# Altium PCB PCB1.PcbDoc
Units mil, origin at the board's own origin, x right, y up, seen from the top; angles counter-clockwise.
Board outline 3670 x 3230 mil, 2 copper layers (Top Layer, Bottom Layer); 72 components, 56 nets, 231 pads, 2 vias.
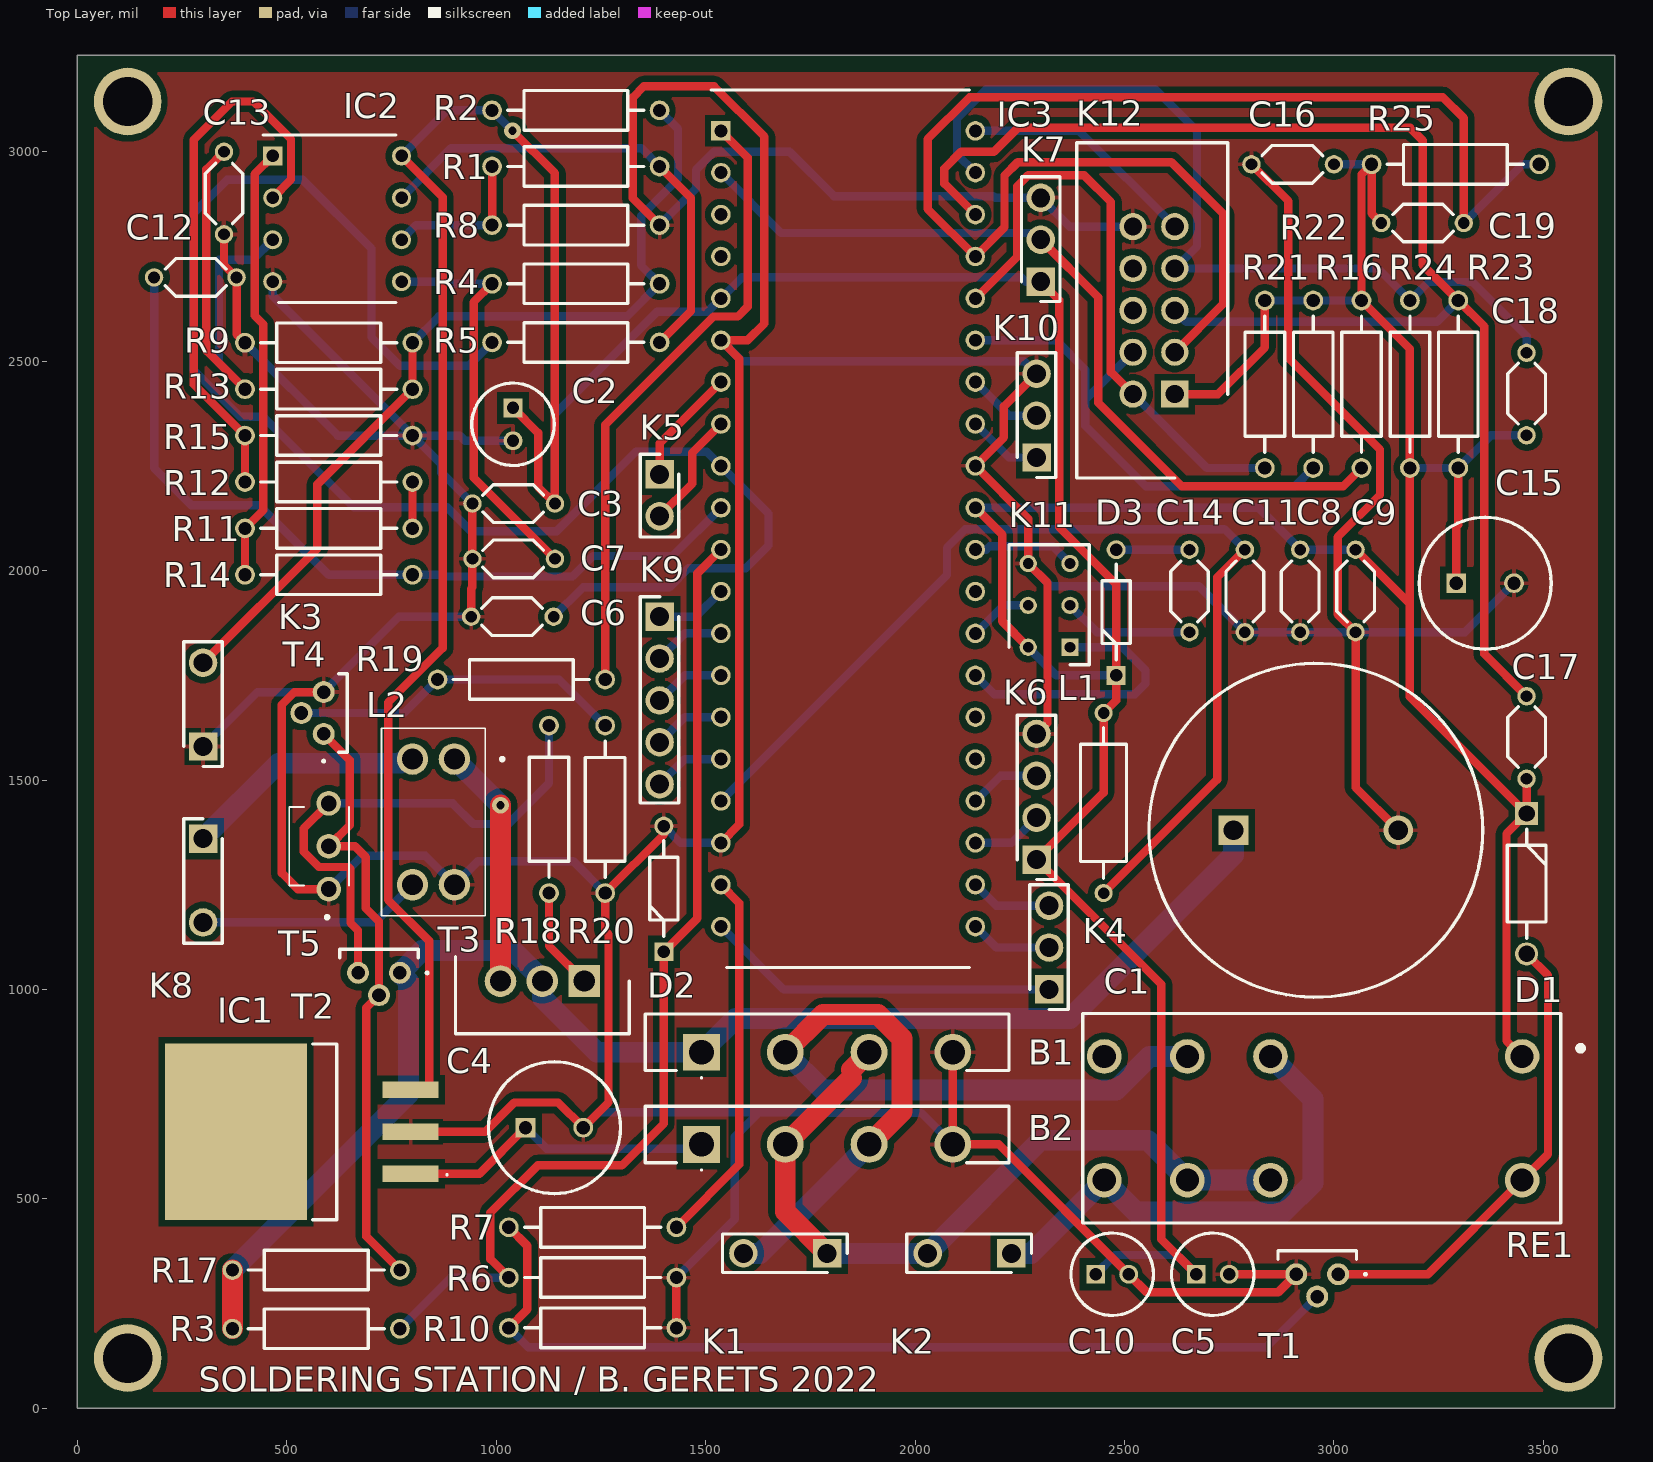
[diagram p0: Top Layer view]
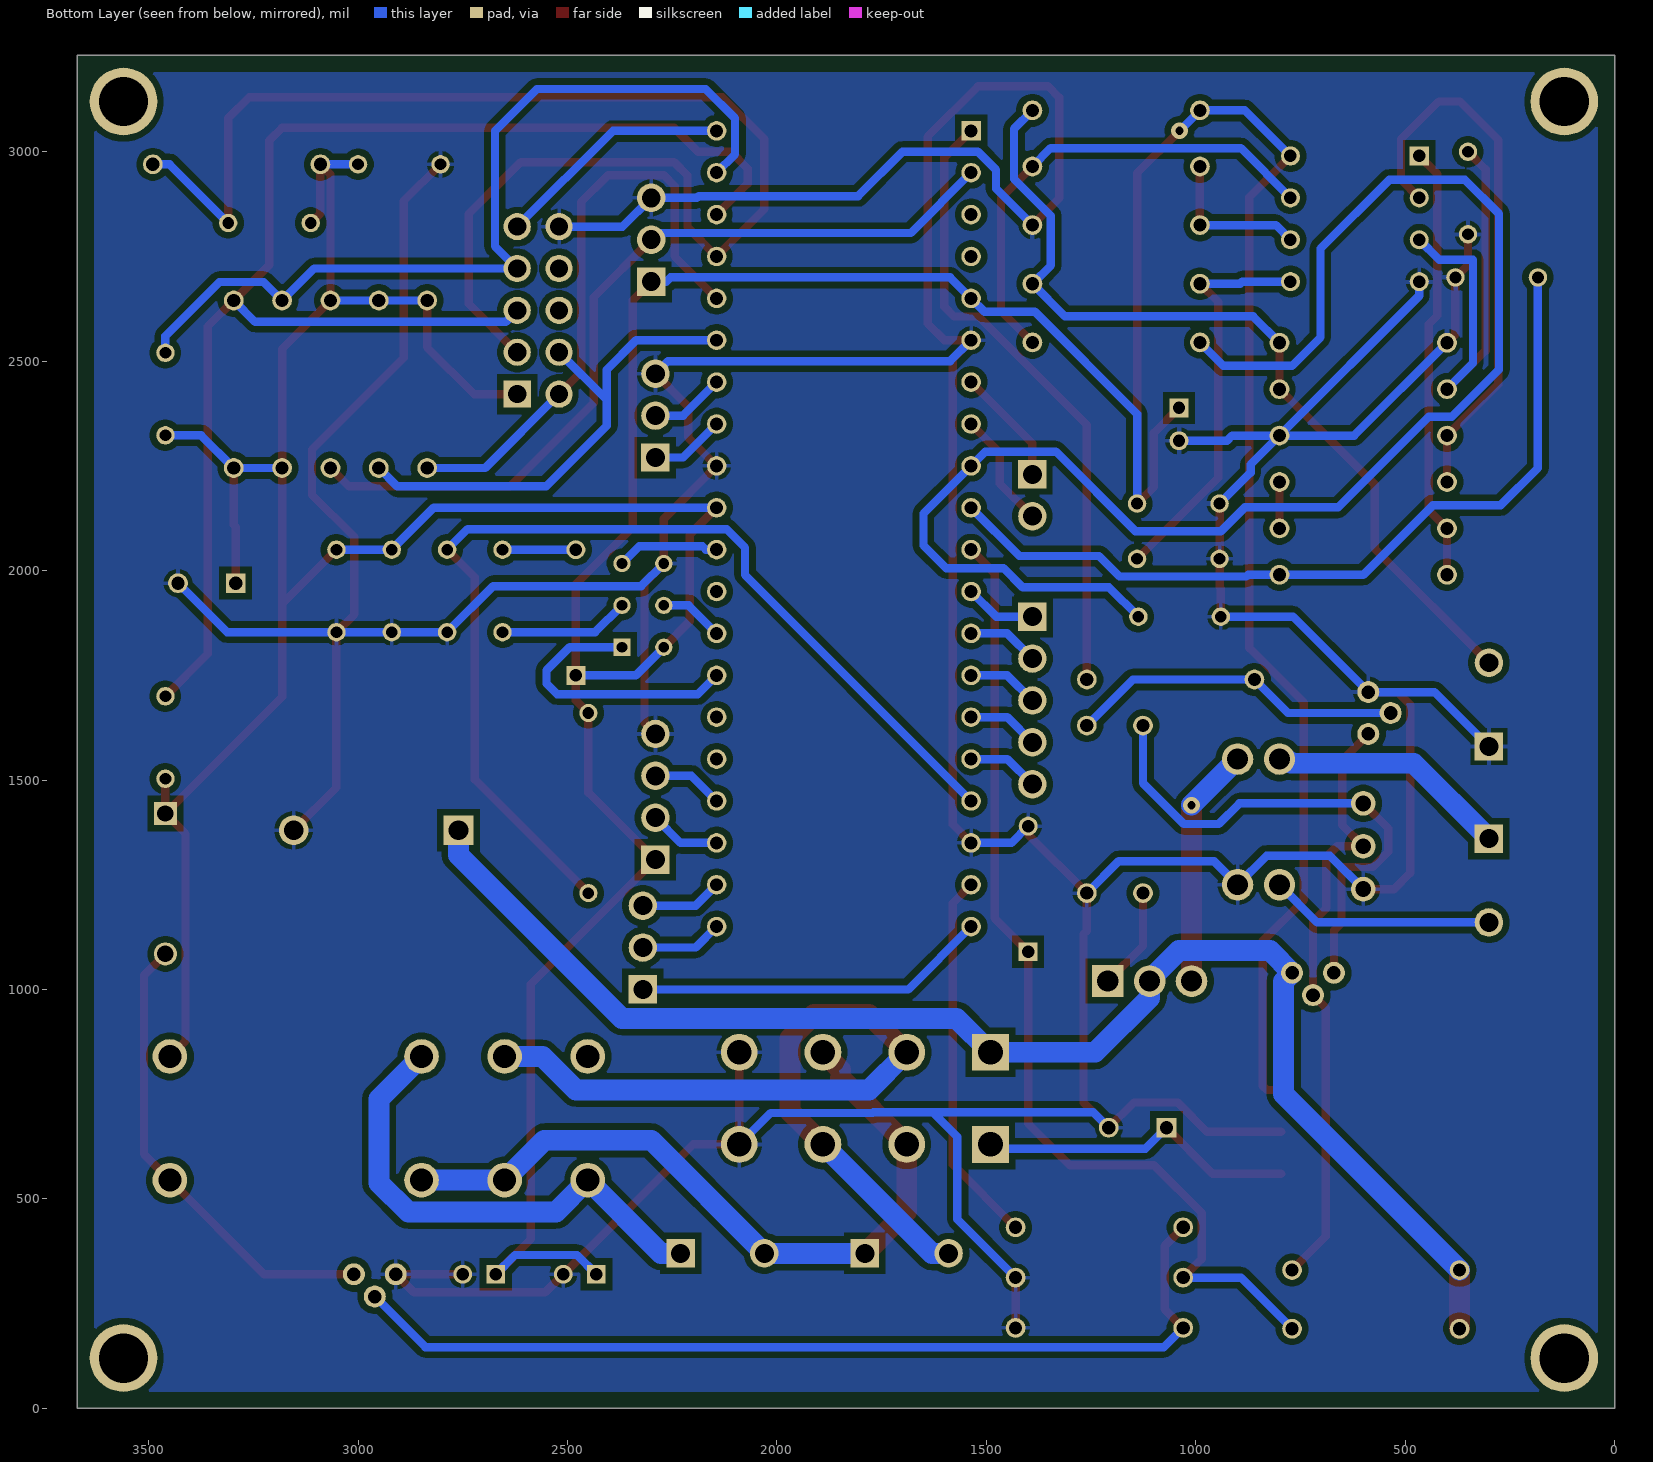
[diagram p1: Bottom Layer view, seen from below]

## Layer stack, top to bottom
Top Solder: solder mask 0.4, Solder Resist, Dk 3.5
Top Layer: signal copper 1.4
Dielectric 1: dielectric 12.6, FR-4, Dk 4.8
Bottom Layer: signal copper 1.4
Bottom Solder: solder mask 0.4, Solder Resist, Dk 3.5

## Board outline
0,0 3670,0 3670,3230 0,3230

## Design rules (kind name [scope] priority, off if disabled: settings)
Clearance Clearance_2 [InNamedPolygon('GND_L02_P000')] p1: gap=15 ignorepadtopadclearanceinfootprint=FALSE
Clearance Clearance_1 [InNamedPolygon('GND_L01_P001')] p2: gap=15 ignorepadtopadclearanceinfootprint=FALSE
Clearance [All] p3: gap=10 ignorepadtopadclearanceinfootprint=FALSE except(0: Arc-Hole Track-Hole SMDPad-Hole THPad-Hole Via-Hole Fill-Hole Poly-Hole Region-Hole Text-Hole)
Height [All] p1 off: minheight=0 maxheight=1000 prefheight=500
HoleSize [All] p1: absolutevalues=TRUE maxlimit=120 minlimit=20 maxpercent=80.000 minpercent=20.000
HoleToHoleClearance [All] p1: gap=19.68 allowstackedmicrovias=TRUE
PolygonConnect [All] p1: connectstyle=Relief reliefconductorwidth=10 reliefentries=4 polygonreliefangle="90 Angle" airgapwidth=10
RoutingVias [All] p1: holewidth=20 width=40 viastyle="Through Hole" minholewidth=20 minwidth=40 maxholewidth=20 maxwidth=40
SilkToSolderMaskClearance [IsPad] p1: minsilkscreentomaskgap=1 clearancetoexposedcopper=TRUE
SolderMaskExpansion [All] p1: expansion=4 istentingtop=FALSE
Width [All] p1: maxlimit=50 minlimit=20 preferedwidth=20 minimp=50.000000 maximp=50.000000 favimp=50.000000
26 further rules are at their usual default settings.

## Classes and differential pairs
component class Processor: C8 C9 C10 C11 C14 D3 IC3 K4 K5 K6 K7 K9 K10 K11 K12 L1 R16 R21 R22
component class Power: B1 B2 C1 C4 C5 D1 D2 IC1 K1 K2 R3 R6 R7 R10 RE1 T1
component class Heating: K8 L2 R17 R18 R19 R20 T2 T3 T4 T5
component class Display: C15 C16 C17 C18 C19 R23 R24 R25
component class Amplification: C2 C3 C6 C7 C12 C13 IC2 K3 R1 R2 R4 R5 R8 R9 R11 R12 R13 R14 R15

## Components (designator, comment, footprint, x,y, rotation, side; value= is the part's Value field where it differs from the comment)
B1 "GBU6J-E3_45" GBU6JE345 1490,850 r180 top
B2 "GBU6J-E3_45" GBU6JE345 1490,630 r180 top
C1 "4700uF" "4700UF CAPACITOR" 2760,1380 r0 top
C2 "10uF" "10UF CAPACITOR" 1040,2388.74 r270 top
C3 "100nF" "5MM LEAD SPACING CAPACITOR" 943,2160 r0 top
C4 "100uF" "100UF CAPACITOR" 1070,670 r0 top
C5 "10uF" "10UF CAPACITOR" 2671.26,320 r0 top
C6 "10nF" "5MM LEAD SPACING CAPACITOR" 940,1890 r0 top
C7 "10nF" "5MM LEAD SPACING CAPACITOR" 943,2028.02 r0 top
C8 "100nF" "5MM LEAD SPACING CAPACITOR" 2919.47,1853 r90 top
C9 "100nF" "5MM LEAD SPACING CAPACITOR" 3051.67,1853 r90 top
C10 "10uF" "10UF CAPACITOR" 2431.26,320 r0 top
C11 "100nF" "5MM LEAD SPACING CAPACITOR" 2787.26,1853 r90 top
C12 "10nF" "5MM LEAD SPACING CAPACITOR" 380,2700 r180 top
C13 "10nF" "5MM LEAD SPACING CAPACITOR" 350,2803 r90 top
C14 "100nF" "5MM LEAD SPACING CAPACITOR" 2655.06,1853 r90 top
C15 "100uF" "100UF CAPACITOR" 3292.2,1970 r0 top
C16 "100nF" "5MM LEAD SPACING CAPACITOR" 2803,2970 r0 top
C17 "10nF" "5MM LEAD SPACING CAPACITOR" 3460,1700 r270 top
C18 "10nF" "5MM LEAD SPACING CAPACITOR" 3460,2520 r270 top
C19 "10nF" "5MM LEAD SPACING CAPACITOR" 3310,2830 r180 top
D1 "1N4007" "0.77MM LEAD DIODE" 3460,1420 r270 top
D2 "1N5231B" "0.5MM LEAD DIODE" 1400,1090 r90 top
D3 "1N4148" "0.5MM LEAD DIODE" 2480,1750 r90 top
IC1 "TL780-05CKTTR" TL78005CKTTR 530,660 r90 top
IC2 "MCP6002-E/P" DIP8E 620,2840 r0 top
IC3 "ATMEGA4809-PF" DIP40E 1840,2100 r0 top
K1 "1729128" "2-PIN TERMINAL BLOCK" 1790,370 r180 top
K2 "1729128" "2-PIN TERMINAL BLOCK" 2230,370 r180 top
K3 "1729128" "2-PIN TERMINAL BLOCK" 300,1580 r90 top
K4 "61300311121" "3-PIN HEADER" 2320,1000 r90 top
K5 "61300311121" "2-PIN HEADER" 1390,2230 r270 top
K6 "61300411121" "4-PIN HEADER" 2290,1310 r90 top
K7 "61300311121" "3-PIN HEADER" 2300,2690 r90 top
K8 "1729128" "2-PIN TERMINAL BLOCK" 300,1360 r270 top
K9 "61300411121" "5-PIN HEADER" 1390,1890 r270 top
K10 "61300311121" "3-PIN HEADER" 2290,2270 r90 top
K11 "61301621121" "2-ROW 6-PIN HEADER" 2370,1817.06 r90 top
K12 "61301621121" "10-WAY BOXHEADER" 2620,2421.32 r90 top
L1 "10uH" "10UH CHOKE COIL" 2450,1230 r90 top
L2 "common mode choke" "common mode choke" 900,1550 r180 top
R1 "18kOhm" RESISTOR 1390,2964.86 r180 top
R2 "1MOhm" RESISTOR 1390,3098.89 r180 top
R3 "68kOhm" RESISTOR 770,190 r180 top
R4 "5.6kOhm" RESISTOR 1390,2684.86 r180 top
R5 "5.6kOhm" RESISTOR 990,2544.86 r0 top
R6 "10kOhm" RESISTOR 1430,312.01 r180 top
R7 "10kOhm" RESISTOR 1430,432.01 r180 top
R8 "100Ohm" RESISTOR 1390,2824.86 r180 top
R9 "10MOhm" RESISTOR 400,2544.03 r0 top
R10 "4.7kOhm" RESISTOR 1430,192.01 r180 top
R11 "18kOhm" RESISTOR 400,2100.81 r0 top
R12 "18kOhm" RESISTOR 800,2211.61 r180 top
R13 "5.6kOhm" RESISTOR 400,2433.22 r0 top
R14 "5.6kOhm" RESISTOR 800,1990 r180 top
R15 "100Ohm" RESISTOR 800,2322.42 r180 top
R16 "4.7kOhm" RESISTOR 3065.9,2245 r90 top
R17 "4.7kOhm" RESISTOR 770,330 r180 top
R18 "100Ohm" RESISTOR 1125.97,1630 r270 top
R19 "10kOhm" RESISTOR 860,1740 r0 top
R20 "4.7kOhm" RESISTOR 1260,1230 r90 top
R21 "4.7kOhm" RESISTOR 2835,2245 r90 top
R22 "4.7kOhm" RESISTOR 2950.45,2245 r90 top
R23 "10kOhm" RESISTOR 3296.8,2645 r270 top
R24 "10kOhm" RESISTOR 3181.35,2645 r270 top
R25 "10kOhm" RESISTOR 3490,2970 r180 top
RE1 "RT424005" RT42 3449.21,692.36 r180 top
T1 "BC547" BC547CBU 3010,320 r180 top
T2 "BC547" BC547CBU 770,1039.63 r180 top
T3 "IRF9Z34NPBF" TO254P469X1042X1967-3P 1210,1020 r180 top
T4 "BC547" BC547CBU 587.9,1610 r90 top
T5 "BC557" BC33740TA 576.97,1306.41 r90 top

## Footprints (in the part's own frame and the unit in brackets; to place one, negate y for a bottom-side part, rotate by r counter-clockwise, add the part's x,y. Pads: shape width x height; smd on the part's side, far side on the other; paste and mask are expansions set on the pad)
"0.5MM LEAD DIODE" [mm]
  rect 1.15x1.15 hole 0.75: 1(0,0)
  round 1.15 hole 0.75: 2(7.62,0)
  silkscreen extent 0.93,-0.86 6.73,0.86, body extent -0.26,-0.95 7.87,0.95
"0.77MM LEAD DIODE" [mil]
  rect 55x55 hole 39: 1(0,0)
  round 55 hole 39: 2(335.12,0)
  silkscreen extent 37,-46 298,46, body extent -11,-53 345,53
"2-PIN HEADER" [mm]
  rect 1.725x1.725 hole 1.15: 1(0,0)
  round 1.725 hole 1.15: 2(2.54,0)
  silkscreen extent -1.21,-1.17 3.81,1.17, body extent -1.07,-1.17 3.81,1.17
"2-PIN TERMINAL BLOCK" [mm]
  rect 1.725x1.725 hole 1.15: 1(0,0)
  round 1.725 hole 1.15: 2(5.08,0)
  silkscreen extent -1.21,-1.17 6.35,1.17, body extent -2.54,-4.06 7.75,4.06
"2-ROW 6-PIN HEADER" [mm]
  rect 1.05x1.05 hole 0.65: 1(0,0)
  round 1.05 hole 0.65: 2(0,2.54) 3(2.54,0) 4(2.54,2.54) 5(5.08,0) 6(5.08,2.54)
  silkscreen extent -1.07,-1.17 6.22,3.71, body extent -1.07,-1.17 6.22,3.71
"3-PIN HEADER" [mm]
  rect 1.725x1.725 hole 1.15: 1(0,0)
  round 1.725 hole 1.15: 2(2.54,0) 3(5.08,0)
  silkscreen extent -1.21,-1.17 6.35,1.17, body extent -1.07,-1.17 6.35,1.17
"4-PIN HEADER" [mm]
  rect 1.725x1.725 hole 1.15: 1(0,0)
  round 1.725 hole 1.15: 2(2.54,0) 3(5.08,0) 4(7.62,0)
  silkscreen extent -1.21,-1.17 8.76,1.17, body extent -1.07,-1.17 8.64,1.17
"5-PIN HEADER" [mm]
  rect 1.725x1.725 hole 1.15: 1(0,0)
  round 1.725 hole 1.15: 2(2.54,0) 3(5.08,0) 4(7.62,0) 5(10.16,0)
  silkscreen extent -1.21,-1.17 11.3,1.17, body extent -1.07,-1.17 11.18,1.17
"5MM LEAD SPACING CAPACITOR" [mil]
  round 44 hole 28: 1(0,0) 2(197,0)
  silkscreen extent 25,-45 170,45
"10-WAY BOXHEADER" [mm]
  rect 1.65x1.65 hole 1.1: 1(0,0)
  round 1.65 hole 1.1: 2(0,2.54) 3(2.54,0) 4(2.54,2.54) 5(5.08,0) 6(5.08,2.54) 7(7.62,0) 8(7.62,2.54) 9(10.16,0) 10(10.16,2.54)
  silkscreen extent -5.08,-3.21 15.24,5.95, body extent -5.08,-3.2 14.99,5.74
"10UF CAPACITOR" [mm]
  rect 1.15x1.15 hole 0.75: 1(0,0)
  round 1.15 hole 0.75: 2(2,0)
  silkscreen extent -1.5,-2.5 3.5,2.5, body extent -1.75,-2.75 3.75,2.75, height 12
"10UH CHOKE COIL" [mm]
  round 1.1 hole 0.7: 1(0,0) 2(10.922,0)
  silkscreen extent 0.9,-1.4 10.02,1.4, body extent -0.25,-1.39 11.18,1.39
"100UF CAPACITOR" [mm]
  rect 1.2x1.2 hole 0.8: 1(0,0)
  round 1.2 hole 0.8: 2(3.5,0)
  silkscreen extent -2.25,-4 5.75,4, body extent -2.5,-4.25 6,4.25, height 12.5
"4700UF CAPACITOR" [mm]
  rect 1.8x1.8 hole 1.2: 1(0,0)
  round 1.8 hole 1.2: 2(10,0)
  silkscreen extent -5.12,-10.12 15.12,10.12, body extent -5.25,-10.24 15.25,10.24, height 42
BC547CBU [mm]
  round 1.333 hole 0.82: 1(0,0) 2(1.27,1.35) 3(2.54,0)
  silkscreen extent -1.7,-1.43 3.65,0.05, body extent -1.11,-1.43 3.65,2.19, height 5.43
BC33740TA [mm]
  round 1.493 hole 0.96: 1(-1.7,-0.585) 2(0.9,-0.585) 3(3.5,-0.585)
  silkscreen extent -3.5,-1.81 3.28,1.81, body extent -2.2,-2.42 3.96,1.71, height 8.67
"common mode choke" [mil]
  round 75 hole 50: 1(0,0) 2(100,0) 3(100,300) 4(0,300)
  silkscreen extent -118,-74 174,374, body extent -74,-74 174,374, height 378
DIP8E [mm]
  rect 1.158x1.158 hole 0.758: 1(-3.905,3.81)
  round 1.158 hole 0.758: 2(-3.905,1.27) 3(-3.905,-1.27) 4(-3.905,-3.81) 5(3.905,-3.81) 6(3.905,-1.27) 7(3.905,1.27) 8(3.905,3.81)
  silkscreen extent -4.48,-5.08 3.56,5.08, body extent -4.04,-4.75 4.04,4.75, height 5.33
DIP40E [mm]
  rect 1.184x1.184 hole 0.784: 1(-7.715,24.13)
  round 1.184 hole 0.784: 2(-7.715,21.59) 3(-7.715,19.05) 4(-7.715,16.51) 5(-7.715,13.97) 6(-7.715,11.43) 7(-7.715,8.89) 8(-7.715,6.35) 9(-7.715,3.81) 10(-7.715,1.27) 11(-7.715,-1.27) 12(-7.715,-3.81) 13(-7.715,-6.35) 14(-7.715,-8.89) 15(-7.715,-11.43) 16(-7.715,-13.97) 17(-7.715,-16.51) 18(-7.715,-19.05) 19(-7.715,-21.59) 20(-7.715,-24.13) 21(7.715,-24.13) 22(7.715,-21.59) 23(7.715,-19.05) 24(7.715,-16.51) 25(7.715,-13.97) 26(7.715,-11.43) 27(7.715,-8.89) 28(7.715,-6.35) 29(7.715,-3.81) 30(7.715,-1.27) 31(7.715,1.27) 32(7.715,3.81) 33(7.715,6.35) 34(7.715,8.89) 35(7.715,11.43) 36(7.715,13.97) 37(7.715,16.51) 38(7.715,19.05) 39(7.715,21.59) 40(7.715,24.13)
  silkscreen extent -8.31,-26.61 7.37,26.61, body extent -7.86,-25.88 7.86,25.88, height 6.35
GBU6JE345 [mm]
  rect 2.235x2.235 hole 1.49: 1(0,0)
  round 2.235 hole 1.49: 2(-5.08,0) 3(-10.16,0) 4(-15.24,0)
  silkscreen extent -18.65,-2.32 3.41,1.6, body extent -18.65,-2.32 3.4,1.11, height 18.9
RESISTOR [mm]
  round 1.2 hole 0.8: 1(0,0) 2(10.16,0)
  silkscreen extent 0.95,-1.2 9.21,1.2, body extent -0.25,-1.3 10.41,1.3
RT42 [mm]
  round 2.1 hole 1.4: 1(0,-3.75) 2(15.26,-3.75) 3(20.3,-3.75) 4(25.34,-3.75) 5(25.34,3.75) 6(20.3,3.75) 7(15.26,3.75) 8(0,3.75)
  silkscreen extent -3.67,-6.35 26.65,6.35, body extent -2.21,-6.35 26.79,6.35, height 15.86
TL78005CKTTR [mm]
  rect 1x3.4 smd: 1(-2.54,-6.745) 2(0,-6.745) 3(2.54,-6.745)
  rect 10.7x8.6 smd: 4(0,3.855)
  silkscreen extent -5.33,-9 5.33,-0.8
TO254P469X1042X1967-3P [mm]
  rect 1.92x1.92 hole 1.28: 1(0,0)
  round 1.92 hole 1.28: 2(2.54,0) 3(5.08,0)
  silkscreen extent -2.73,-1.49 7.81,3.2, body extent -2.67,-1.5 7.75,3.19, height 18.84

## Part data
B1 B2: "Bridge Rectifier", Manufacturer_Name=Vishay, Manufacturer_Part_Number=GBU6J-E3/45, Datasheet Link=http://www.vishay.com/docs/88615/gbu6a.pdf, Height=18.8mm
C1: library part "4700uF capacitor", "Capacitor Polarised", Manufacturer_Name=Nichicon, Manufacturer_Part_Number=UVR1H472MRD, Datasheet Link=https://www.mouser.co.uk/datasheet/2/293/e-vr-6088.pdf, Height=42mm
C2 C5 C10: library part "10uF capacitor", "Capacitor Polarised", Manufacturer_Name=Panasonic, Manufacturer_Part_Number=ECA-1HM100B, Mouser2 Part Number=667-ECA-1HM100B, Datasheet Link=https://componentsearchengine.com//ECA-1HM100B.pdf, Height=12mm, Mouser2 Price/Stock=https://www.mouser.com/Search/Refine.aspx?Keyword=667-ECA-1HM100B
C3 C9 C11: library part "100nF capacitor", "Capacitor", Manufacturer_Name=Nichicon, Manufacturer_Part_Number=UVR1H472MRD, Datasheet Link=https://www.mouser.co.uk/datasheet/2/293/e-vr-6088.pdf, Height=42mm
C4: library part "100uF capacitor", "Capacitor Polarised", Manufacturer_Name=Kemet, Manufacturer_Part_Number=ESK107M050AG3EA, Height=12.5mm
C6 C7 C12 C13: library part "10nF capacitor", "Capacitor", Manufacturer_Name=Nichicon, Manufacturer_Part_Number=UVR1H472MRD, Datasheet Link=https://www.mouser.co.uk/datasheet/2/293/e-vr-6088.pdf, Height=42mm
C8 C14 C16 C17 C18 C19: "Capacitor", Manufacturer_Name=Nichicon, Manufacturer_Part_Number=UVR1H472MRD, Datasheet Link=https://www.mouser.co.uk/datasheet/2/293/e-vr-6088.pdf, Height=42mm
C15: "Capacitor Polarised", Manufacturer_Name=Kemet, Manufacturer_Part_Number=ESK107M050AG3EA, Height=12.5mm
D1: "Diode", Manufacturer_Name=Diotec, Mouser Part Number=637-1N4007, Arrow Part Number=1N4007, Arrow Price/Stock=https://www.arrow.com/en/products/1n4007/diotec-semiconductor-ag?region=europe, Datasheet Link=https://diotec.com/tl_files/diotec/files/pdf/datasheets/1n4001.pdf, Manufacturer_Part_Number=1N4007, Mouser Price/Stock=https://www.mouser.co.uk/ProductDetail/Diotec-Semiconductor/1N4007?qs=OlC7AqGiEDmK9mU1uTiCkg%3D%3D
D2: "Zener Diode", Manufacturer_Name="ON Semiconductor", Manufacturer_Part_Number=1N5231B
D3: "Diode", Manufacturer_Name=Nexperia, Datasheet Link=https://datasheet.datasheetarchive.com/originals/distributors/Datasheets-112/DSAP0040891.pdf, Manufacturer_Part_Number=1N4148
IC1: "DC Converter", Manufacturer_Name="Texas Instruments", Datasheet Link=http://www.ti.com/general/docs/suppproductinfo.tsp?distId=26&gotoUrl=http%3A%2F%2Fwww.ti.com%2Flit%2Fgpn%2Ftl780, Height=5.08mm, Manufacturer_Part_Number=TL780-05CKTTR
IC2: "Dual Opamp", Case/Package=PDIP, Input Bias Current=1pA, Input Offset Voltage (Vos)=4.5mV, Max Operating Temperature=125°C, Max Supply Voltage=6V, Min Operating Temperature=-40°C, Min Supply Voltage=1.8V, Nominal Supply Current=100uA, Operating Supply Voltage=5.5V, Output Current=23mA, Package Quantity=60, Power Supply Rejection Ratio (PSRR)=86dB, Voltage Gain=112dB, Amplifier Type="GENERAL PURPOSE", Bandwidth=1MHz, Common Mode Rejection Ratio=60dB, Gain Bandwidth Product=1MHz, Height=3.3mm, Input Offset Voltage-Max=4.5mV, Lead Free="Lead Free", Length=9.27mm, Mount="Through Hole", Number of Amplifiers=2, Number of Channels=2, Number of Circuits=2, Number of Elements=2, Number of Pins=8, Operating Supply Current=100uA, Output Current per Channel=23mA, Packaging=Rail/Tube, Radiation Hardening=No, REACH SVHC="No SVHC", RoHS Compliant=Yes, Slew Rate=0.6V/µs, Slew Rate-Nom=0.6V/µs, Supply Current=100uA, Technology=CMOS, Unity Gain Bandwidth Product=1MHz, Width=6.35mm
IC3: "Integrated Circuit", Manufacturer_Name=Microchip, Mouser2 Part Number=556-ATMEGA4809-PF, Datasheet Link=https://componentsearchengine.com//ATMEGA4809-PF.pdf, Height=6.35mm, Manufacturer_Part_Number=ATMEGA4809-PF, Mouser2 Price/Stock=https://www.mouser.com/Search/Refine.aspx?Keyword=556-ATMEGA4809-PF
K1 K2 K3 K8: library part "MKDSN 1,5/ 2-5,08", "PCB Terminal Block, 13.5 A, 400 V, 2-Pin THD, RoHS, Bulk", Current Rating=13500mA, Manufacturer="Phoenix Contact", Package Description="2-Pin Through Hole Device, Body 8.1 x 10.16 mm, Pitch 5.08 mm", Package Reference=1729128-2, Package Version=03/2015, Voltage Rating=400V, Datasheet URL=https://datasheet.ciiva.com/16046/1729128-16046181.pdf, Datasheet Version=12/2013, Manufacturer URL=http://www.phoenixcontact.com/, Mounting Technology=ThroughHole, No. of Positions=2, No. of Rows=1, Orientation=Horizontal, Package URL=https://www.phoenixcontact.com/online/portal/pi/pxc/product_detail_page/!ut/p/b1/3VdJjqNKFDxLH8AFycySyWY2ozFsEPOMMQaDOX1XedGL_1Vdm5YXJleknhSKeBkvI6EA8ncAo3AYoDhBQGco6KN7VURTdemj9us_IEKEZo_YHiPAEWEFmDGOHMORkqKYCORBZxgL7ZoaZYcbFFUZ3fqxSY6GOuxydWUuHqz1ynmMFygu583Bob0Ewr6Sd_l-5m-kAueHiB0jpRwZwe58wwtkpxtMYd_LmGcDRU02dRNEyWt6Y2ti5pSyJ_reIkzIulrqApdnbT11V5jnCKbYNCvhEM1MCpPByat_X379-iThf08CI5GfOPqfBeS3BRoBOdD55AKVv0iLwCMq-2BrzXWSGRH7pUGD9uwXQjiph3xL0DKQwdGa0JImiIOmBNOestqgwTHSSs2oOep-78apyXQBvNi8ZLaFjvjWvcaUEBu0MC6Wbe-d6mB0FAebo2lUWinqYaZs5DAYzV0RP9yitUjnGJ0iI9xhZkT42OCQNUJJhkgWINNQLP2JFP6OpMg3JCVg70jqHT0lvKOnhHf0lPuOnnLf0VPuWx6_dxwUIvwk5WMkT0kLL1mh61l2yZVSzG3pYV_bqo-mj6uMKwKwdnnW8Jh5RTOJzMOA5c-eJDaZQw4mTMPH02PvS_ZAqNVjVTo2WyYLkwH_KU1mmmG5kjRhDqPXLwwVHvVOjCM60-fpXvTDfMGW1PVFVS1r4e4yVDk4ZdNbkUHvqPqQSeian4UD39fNKmachqdJ1NJbyk8rXT9mXTvPk3oE5meulKGgiruPJek-4I9hTT6G8ZLOyRSm2RRVbThERQad5OS28hdt4YW4vG0stgYYzsWsK4_7y6DZMjJSCqri1kyiZR5vD7pwIrNR7QwPHTcLTI5qT7eRlpHrdGiupYlqQDJ7zy_CND8fWWBoLRXxk1RVcXiBQwbTD4Xi7KL-FuO94t9xaqweXzH, Packing=Bulk, PartNumber=1729128, Pitch=5.08mm, RoHS=TRUE
K4 K7 K10: library part "3-pin header", "THT Vertical Pin Header WR-PHD, Pitch 2.54 mm, Single Row, 3 pins", Contact Resistance=20mOhm, Manufacturer="Wurth Elektronik", Operating Temperature=-40to105degC, Rated Current=3A, Withstanding Voltage=500VAC, Working Voltage=250VAC, Datasheet URL=https://katalog.we-online.de/em/datasheet/6130xx11121.pdf, Gender=Male, Manufacturer URL=http://www.we-online.de, Mounting Technology=THT, Orientation=Vertical, Package Reference=61300311121, Packaging=Bag, Part Number=61300311121, Pin Number=3, Pitch=2.54mm, Publisher=WurthElektronik, Row Number=Single
K5: library part "2-pin header", "THT Vertical Pin Header WR-PHD, Pitch 2.54 mm, Single Row, 3 pins", Contact Resistance=20mOhm, Manufacturer="Wurth Elektronik", Operating Temperature=-40to105degC, Rated Current=3A, Withstanding Voltage=500VAC, Working Voltage=250VAC, Datasheet URL=https://katalog.we-online.de/em/datasheet/6130xx11121.pdf, Gender=Male, Manufacturer URL=http://www.we-online.de, Mounting Technology=THT, Orientation=Vertical, Package Reference=61300311121, Packaging=Bag, Part Number=61300311121, Pin Number=3, Pitch=2.54mm, Publisher=WurthElektronik, Row Number=Single
K6: library part "4-pin header", "THT Vertical Pin Header WR-PHD, Pitch 2.54 mm, Single Row, 4 pins", Contact Resistance=20mOhm, Manufacturer="Wurth Elektronik", Operating Temperature=-40to105degC, Rated Current=3A, Withstanding Voltage=500VAC, Working Voltage=250VAC, Datasheet URL=https://katalog.we-online.de/em/datasheet/6130xx11121.pdf, Gender=Male, Manufacturer URL=http://www.we-online.de, Mounting Technology=THT, Orientation=Vertical, Package Reference=61300411121, Packaging=Bag, Part Number=61300411121, Pin Number=4, Pitch=2.54mm, Publisher=WurthElektronik, Row Number=Single
K9: library part "5-pin header", "THT Vertical Pin Header WR-PHD, Pitch 2.54 mm, Single Row, 4 pins", Contact Resistance=20mOhm, Manufacturer="Wurth Elektronik", Operating Temperature=-40to105degC, Rated Current=3A, Withstanding Voltage=500VAC, Working Voltage=250VAC, Datasheet URL=https://katalog.we-online.de/em/datasheet/6130xx11121.pdf, Gender=Male, Manufacturer URL=http://www.we-online.de, Mounting Technology=THT, Orientation=Vertical, Package Reference=61300411121, Packaging=Bag, Part Number=61300411121, Pin Number=4, Pitch=2.54mm, Publisher=WurthElektronik, Row Number=Single
K11: library part "6-pin header", "THT Vertical Pin Header WR-PHD, Pitch 2.54 mm, Dual Row, 16 pins", Contact Resistance=20mOhm, Manufacturer="Wurth Elektronik", Operating Temperature=-40to105degC, Rated Current=3A, Withstanding Voltage=500VAC, Working Voltage=250VAC, Datasheet URL=https://katalog.we-online.de/em/datasheet/6130xx21121.pdf, Gender=Male, Manufacturer URL=http://www.we-online.de, Mounting Technology=THT, Orientation=Vertical, Package Reference=61301621121, Packaging=Bag, Part Number=61301621121, Pin Number=16, Pitch=2.54mm, Publisher=WurthElektronik, Row Number=Dual
K12: library part "10-pole box header", "THT Vertical Pin Header WR-PHD, Pitch 2.54 mm, Dual Row, 16 pins", Contact Resistance=20mOhm, Manufacturer="Wurth Elektronik", Operating Temperature=-40to105degC, Rated Current=3A, Withstanding Voltage=500VAC, Working Voltage=250VAC, Datasheet URL=https://katalog.we-online.de/em/datasheet/6130xx21121.pdf, Gender=Male, Manufacturer URL=http://www.we-online.de, Mounting Technology=THT, Orientation=Vertical, Package Reference=61301621121, Packaging=Bag, Part Number=61301621121, Pin Number=16, Pitch=2.54mm, Publisher=WurthElektronik, Row Number=Dual
L1: library part "10uH choke coil", "Inductor", Manufacturer_Name=Bourns, Manufacturer_Part_Number=78F100J-RC, Mouser2 Part Number=542-78F100-RC, Datasheet Link=https://componentsearchengine.com//78F100J-RC.pdf, Mouser2 Price/Stock=https://www.mouser.com/Search/Refine.aspx?Keyword=542-78F100-RC
L2: "Inductor", Manufacturer_Name="Laird Technologies", Manufacturer_Part_Number=CM2545X171B-10, Datasheet Link=https://datasheet.datasheetarchive.com/originals/dk/DKDS-7/122753.pdf, Height=9.5mm
R1 R11 R12: library part "18kOhm resistor", "Resistor", Manufacturer_Name="YAGEO (PHYCOMP)", Manufacturer_Part_Number=CFR-25JT-52-10K
R2: library part "1MOhm resistor", "Resistor", Manufacturer_Name=Ohmite, Manufacturer_Part_Number=OK1055E-R52
R3: library part "68kOhm resistor", "Resistor", Manufacturer_Name="YAGEO (PHYCOMP)", Manufacturer_Part_Number=CFR-25JR-52-68K, Datasheet Link=https://componentsearchengine.com/Datasheets/1/CFR-25JR-52-68K.pdf
R4 R5 R13 R14: library part "5.6kOhm resistor", "Resistor", Manufacturer_Name="YAGEO (PHYCOMP)", Manufacturer_Part_Number=CFR-25JB-52-5K6, Mouser2 Part Number=603-CFR-25JB-52-5K6, Datasheet Link=https://componentsearchengine.com//CFR-25JB-52-5K6.pdf, Mouser2 Price/Stock=https://www.mouser.com/Search/Refine.aspx?Keyword=603-CFR-25JB-52-5K6
R6 R19: library part "10kOhm resistor", "Resistor", Manufacturer_Name="YAGEO (PHYCOMP)", Manufacturer_Part_Number=CFR-25JT-52-10K
R7 R23 R24 R25: "Resistor", Manufacturer_Name="YAGEO (PHYCOMP)", Manufacturer_Part_Number=CFR-25JT-52-10K
R8 R15 R18: library part "100Ohm resistor", "Resistor", Manufacturer_Name="YAGEO (PHYCOMP)", Manufacturer_Part_Number=CFR-25JR-52-100R, Mouser2 Part Number=603-CFR-25JR-52100R, Datasheet Link=https://componentsearchengine.com//CFR-25JR-52-100R.pdf, Mouser2 Price/Stock=https://www.mouser.com/Search/Refine.aspx?Keyword=603-CFR-25JR-52100R
R9: library part "10MOhm resistor", "Resistor", Manufacturer_Name="YAGEO (PHYCOMP)", Manufacturer_Part_Number=CFR-25JT-52-10M, Datasheet Link=https://datasheet.datasheetarchive.com/originals/distributors/Datasheets_SAMA/cf5c7c7b14e59499e9125003e6ee5ce2.pdf
R10 R16 R21 R22: "Resistor", Manufacturer_Name="YAGEO (PHYCOMP)", Manufacturer_Part_Number=CFR-25JT-52-4K7, Mouser2 Part Number=603-CFR-25JT-52-4K7, Datasheet Link=https://componentsearchengine.com//CFR-25JT-52-4K7.pdf, Mouser2 Price/Stock=https://www.mouser.com/Search/Refine.aspx?Keyword=603-CFR-25JT-52-4K7
R17 R20: library part "4.7kOhm resistor", "Resistor", Manufacturer_Name="YAGEO (PHYCOMP)", Manufacturer_Part_Number=CFR-25JT-52-4K7, Mouser2 Part Number=603-CFR-25JT-52-4K7, Datasheet Link=https://componentsearchengine.com//CFR-25JT-52-4K7.pdf, Mouser2 Price/Stock=https://www.mouser.com/Search/Refine.aspx?Keyword=603-CFR-25JT-52-4K7
RE1: "Relay", Manufacturer_Name="TE Connectivity", Mouser2 Part Number=655-RT424005, Datasheet Link=https://componentsearchengine.com//RT424005.pdf, Manufacturer_Part_Number=RT424005, Mouser2 Price/Stock=https://www.mouser.com/Search/Refine.aspx?Keyword=655-RT424005
T1 T2 T4: "Transistor BJT NPN", Manufacturer_Name="ON Semiconductor", Manufacturer_Part_Number=BC547CBU, Datasheet Link=https://www.onsemi.com/pdf/datasheet/bc550-d.pdf, Height=5.33mm
T3: "MOSFET (P-Channel)", Manufacturer_Name=Infineon, Mouser2 Part Number=942-IRF9Z34NPBF, Datasheet Link=https://componentsearchengine.com//IRF9Z34NPBF.pdf, Height=4.69mm, Manufacturer_Part_Number=IRF9Z34NPBF, Mouser2 Price/Stock=https://www.mouser.com/Search/Refine.aspx?Keyword=942-IRF9Z34NPBF
T5: "Transistor BJT PNP", Manufacturer_Name="ON Semiconductor", Manufacturer_Part_Number=BC557ATA, Mouser2 Part Number=512-BC557ATA, Datasheet Link=https://componentsearchengine.com//BC557ATA.pdf, Mouser2 Price/Stock=https://www.mouser.com/Search/Refine.aspx?Keyword=512-BC557ATA

## Free pads (board coordinates)
  round 161.42 hole 118.11: H1(120,3120) H2(3560,3120) H3(3560,120) H4(120,120)

## Via types
v1: diameter 40, hole 20, Top Layer to Bottom Layer, 2 vias

## Nets (pads, with @x,y where several pads share a name; then routed paths per layer and width w, separated by ;. In a path a pad name is that pad's centre, name@x,y a point inside that pad or via, vN(x,y) a via of type N, cw(c..) or ccw(c..) an arc to the next point about the centre after c; other vN are vias at no path point)
Amplification-PD0: C6.2 IC3.9 R5.1 | length 3784.2
  Bottom Layer w20: R5.1 934.14,2489 770,2489 702,2557 702,2769 538,2933 357,2933 276,2852 276,2480 389,2367 444,2367 660,2151 883,2151 940,2094 1144,2094 1334,2284 1502.26,2284 IC3.9 1650,2136.26 1650,2060 1596,2006 1459,2006 1413,1960 1207,1960 C6.2
Amplification-PD1: C12.2 IC3.10 R14.1 | length 1983.5
  Bottom Layer w20: C12.2 183,2245 272,2156 434,2156 600,1990 R14.1 875,1990 879,1986 1182,1986 1231,2035 1421.26,2035 IC3.10
Display1-Processor: C2.1 C3.2 C5.1 C8.2 C9.2 C10.1 C15.1 C16.2 C17.2 C18.2 C19.2 D1.1 D3.1 IC1.3 IC2.8 IC3.5 IC3.31 K6.1 K7.1 K11.2 K12.1 L1.2 R2.2 R16.2 R21.2 R22.2 R23.2 R24.2 R25.2 RE1.1 | length 14017.8
  Top Layer w20: IC2.8 872,2891.74 872,1815 742,1685 742,1214 840,1116 840,769.69 830.31,760 IC1.3 ; v1(1038.89,3050) 1140,2948.89 C3.2 1100,2200 1100,2328.74 C2.1 ; IC3.31 2208,2085.74 2208,1879.06 K11.2 ; K7.1 2344,2646 2344,2104 2480,1968 D3.1 2480,1690 L1.2 2450,1470 K6.1 2588,1012 2588,403.26 C5.1 ; K12.1 2723.32,2421.32 2835,2533 R21.2 ; C9.2 3181.35,1920.33 ; C19.2 3090,2853 R25.2 3065.9,2945.9 R16.2 3181.35,2529.55 R24.2 3181.35,1920.33 ; C15.1 3292.2,2105 3296.8,2109.59 R23.2 ; RE1.1 3412,877.21 3412,1372 D1.1 ; C17.2 D1.1 ; 3181.35,1920.33 3181.35,1698.65 D1.1
  Bottom Layer w20: IC2.8 882.63,3098.89 R2.2 v1(1038.89,3050) ; C3.2 1140,2374 1384,2618 1504.26,2618 IC3.5 1586.26,2700 2254,2700 2264,2690 K7.1 ; IC3.31 2819.47,2150 C8.2 C9.2 ; K11.2 2337.06,1750 D3.1 ; C10.1 2477.26,366 2625.26,366 C5.1 ; R21.2 R22.2 R16.2 ; C16.2 R25.2 ; R24.2 R23.2 3374.8,2323 C18.2
Display3-Processor: C19.1 IC3.37 K12.3 R25.1 | length 3344.3
  Top Layer w20: K12.3 2736,2637.32 2736,2851 2612,2975 2245,2975 2213.52,2943.53 2213.52,2819.78 IC3.37 2030,2863.74 2030,3030 2130,3130 3260,3130 3310,3080 C19.1
  Bottom Layer w20: C19.1 3450,2970 R25.1
Display5-Processor: C17.1 IC3.38 K12.5 R23.1 | length 3474.1
  Top Layer w20: IC3.38 2070,2923.74 2070,2960 2110,3000 2188,3000 2245,3057 3182,3057 3212,3027 3212,2729.8 R23.1 3359,2582.8 3359,1801 C17.1
  Bottom Layer w20: K12.5 2647.32,2594 3245.8,2594 R23.1
Display7-Processor: C18.1 IC3.39 K12.7 R24.1 | length 2125.4
  Bottom Layer w20: IC3.39 2100,2993.74 2100,3080 2170,3150 2573,3150 2673,3050 2673,2774.32 K12.7 3105.03,2721.32 R24.1 3225.35,2689 3331,2689 3460,2560 C18.1
GND: B1.4 B2.4 C1.2 C2.2 C3.1 C4.2 C5.2 C6.1 C7.1 C8.1 C9.1 C10.2 C11.1 C12.1 C13.1 C15.2 C16.1 D2.2 IC1.2 IC2.4 IC3.6 IC3.18 IC3.32 K3.1 K6.4 K7.3 K10.3 K11.6 K12.10 L2.4 R6.1 R8.1 R9.1 R10.1 R15.1 R20.1 T1.3 T4.3 T5.1 | length 17214.8
  Top Layer w20: C13.1 350,2730 C12.1 380,2564.03 R9.1 ; T4.3 518,1710 488,1680 488,1277.57 526.09,1239.48 T5.1 ; IC1.2 973,660 1043,730 1147.8,730 C4.2 1268,730.2 1268,1132 1260,1140 R20.1 1400,1370 D2.2 ; C6.1 940,1957 943,1960 C7.1 C3.1 ; R8.1 1326,2888.86 1326,3130 1352,3156 1520,3156 1640,3036 1640,2590 1600,2550 IC3.6 1580,2506.26 1580,1393.74 IC3.18 ; R10.1 R6.1 ; B1.4 B2.4 2200,630 C10.2 2553,277 2867,277 T1.3 C5.2 ; K6.4 2316.06,1636.06 2316.06,1971 K11.6 2270,2123.74 IC3.32 2212,2318.26 2212,2392 K10.3 ; C16.1 2891,2882 2891,2508 3110,2289 3110,2181 3009,2080 3009,1895.67 C9.1 3051.67,1482.03 C1.2
  Bottom Layer w20: K3.1 430,1710 T4.3 767.9,1890 C6.1 ; R9.1 621.61,2322.42 R15.1 ; IC2.4 466.26,2656.16 R15.1 ; T5.1 679.52,1319 831,1319 L2.4 956,1306 1184,1306 R20.1 ; C3.1 869,2234 869,2253.42 R15.1 ; C2.2 925.42,2310 913,2322.42 R15.1 ; C4.2 1244.8,707 1628,707 ; R8.1 1477,2911.86 1477,2957 1520,3000 1700,3000 1806,2894 2187,2894 2191,2890 K7.3 2368.68,2821.32 K12.10 ; D2.2 1440,1350 IC3.18 ; R6.1 1569,451.01 1569,648 1628,707 ; IC3.6 1586.26,2500 2260,2500 K10.3 ; B2.4 2015,705 1771.36,705 1769.36,707 1628,707 ; K11.6 2324.06,1963 2677.26,1963 C11.1 C8.1 C9.1 3313,1853 C15.2
Heating-PC0: IC3.1 R19.2 | length 1511.2
  Top Layer w20: R19.2 1260,2348 1518.69,2606.69 1576.69,2606.69 1600,2630 1600,2986.26 IC3.1
NetB1_2: B1.2 B2.3 K1.2 RE1.3 | length 2063.6
  Top Layer w50: B1.2 1780,940 1911.72,940 1969,882.72 1969,709 B2.3
  Bottom Layer w50: K1.2 1630,370 B2.3 ; B1.2 1780,760 2479.53,760 2559.53,840 RE1.3
NetB1_3: B1.3 B2.2 K1.1 K2.2 RE1.6 RE1.7 | length 1814
  Top Layer w20: 1848.23,788.23 1848.23,808.23
  Top Layer w50: K1.1 1690,470 B2.2 1848.23,788.23 ; 1848.23,808.23 B1.3
  Bottom Layer w50: K1.1 K2.2 2300,640 2554.72,640 RE1.6 RE1.7
NetB2_1: B2.1 C4.1 IC1.1 | length 764.9
  Top Layer w20: IC1.1 960,560 C4.1
  Bottom Layer w20: C4.1 1120,620 1480,620 B2.1
NetC7_2: C7.2 IC2.5 R4.2 | length 973.8
  Top Layer w20: R4.2 946,2640.86 946,2222.02 C7.2
  Bottom Layer w20: IC2.5 889,2690 894.14,2684.86 R4.2
NetC11_2: C11.2 IC3.17 L1.1 | length 2538.1
  Top Layer w20: L1.1 2721,1501 2721,1983.74 C11.2
  Bottom Layer w20: IC3.17 2076,1989.74 2076,2055 2120,2099 2738.26,2099 C11.2
NetC13_2: C13.2 IC2.3 R13.1 | length 1104.9
  Top Layer w20: C13.2 308,2958 308,2525.22 R13.1
  Bottom Layer w20: R13.1 338,2495.22 338,2742 418.26,2742 IC2.3
NetC14_1: C14.1 K11.3 | length 311.6
  Bottom Layer w20: K11.3 2434.06,1853 C14.1
NetC14_2: C14.2 D3.2 | length 175.1
  Bottom Layer w20: D3.2 C14.2
NetD1_2: D1.2 RE1.8 T1.1 | length 1119.2
  Top Layer w20: T1.1 3224.49,320 RE1.8 3511,606.51 3511,1033.88 D1.2
NetIC2_1: IC2.1 R11.1 R14.2 | length 1044.8
  Top Layer w20: R14.2 R11.1 444,2144.81 444,2588 423,2609 423,2946.74 IC2.1
NetIC2_2: IC2.2 R12.2 R15.2 | length 1333
  Top Layer w20: R12.2 R15.2 278,2444.42 278,3029 369,3120 420,3120 510,3030 510,2933.74 IC2.2
NetIC2_6: IC2.6 R1.2 R8.2 | length 370.7
  Top Layer w20: R8.2 R1.2
  Bottom Layer w20: IC2.6 808.6,2824.86 R8.2
NetIC2_7: IC2.7 R1.1 R5.2 | length 1165.5
  Top Layer w20: R5.2 1465,2619.86 1465,2889.86 R1.1
  Bottom Layer w20: IC2.7 892.22,3008.48 1346.38,3008.48 R1.1
NetIC3_2: IC3.2 K7.2 R16.1 | length 2005.7
  Top Layer w20: K7.2 2437.52,2652.48 2437.52,2400.48 2637,2201 3021.9,2201 R16.1
  Bottom Layer w20: IC3.2 1680.26,2806 2284,2806 K7.2
NetIC3_7: IC3.7 K5.1 | length 280.6
  Top Layer w20: K5.1 1390,2303.74 IC3.7
NetIC3_8: IC3.8 K5.2 | length 280.6
  Top Layer w20: K5.2 1468,2208 1468,2281.74 IC3.8
NetIC3_12: IC3.12 K9.1 | length 171.1
  Bottom Layer w20: K9.1 1476.26,1890 IC3.12
NetIC3_13: IC3.13 K9.2 | length 171.1
  Bottom Layer w20: K9.2 1450,1850 IC3.13
NetIC3_14: IC3.14 K9.3 | length 171.1
  Bottom Layer w20: K9.3 1450,1750 IC3.14
NetIC3_15: IC3.15 K9.4 | length 171.1
  Bottom Layer w20: K9.4 1450,1650 IC3.15
NetIC3_16: IC3.16 K9.5 | length 171.1
  Bottom Layer w20: K9.5 1450,1550 IC3.16
NetIC3_20: IC3.20 K4.1 | length 845.9
  Bottom Layer w20: IC3.20 1686.26,1000 K4.1
NetIC3_21: IC3.21 K4.2 | length 197
  Bottom Layer w20: IC3.21 2193.74,1100 K4.2
NetIC3_22: IC3.22 K4.3 | length 197
  Bottom Layer w20: IC3.22 2193.74,1200 K4.3
NetIC3_23: IC3.23 K6.2 | length 171.1
  Bottom Layer w20: IC3.23 2230,1350 K6.2
NetIC3_24: IC3.24 K6.3 | length 171.1
  Bottom Layer w20: IC3.24 2203.74,1510 K6.3
NetIC3_27: IC3.27 K11.1 | length 670.1
  Bottom Layer w20: IC3.27 2188.74,1705 2525,1705 2550,1730 2550,1762.06 2495,1817.06 K11.1
NetIC3_28: IC3.28 K11.4 | length 154
  Bottom Layer w20: IC3.28 2210.8,1917.06 K11.4
NetIC3_30: IC3.30 K11.5 | length 246.5
  Bottom Layer w20: IC3.30 2169.74,2050 2177.74,2058 2329.06,2058 K11.5
NetIC3_33: IC3.33 K10.1 | length 179.4
  Bottom Layer w20: IC3.33 2223.74,2270 K10.1
NetIC3_34: IC3.34 K10.2 | length 179.4
  Bottom Layer w20: IC3.34 2223.74,2370 K10.2
NetIC3_35: IC3.35 K12.4 R22.1 | length 1209.2
  Bottom Layer w20: IC3.35 2336,2550 2406,2480 2406,2407.32 ; K12.4 2406,2407.32 ; R22.1 2906.45,2201 2551,2201 2406,2346 2406,2407.32
NetIC3_36: IC3.36 K12.2 R21.1 | length 1438.8
  Top Layer w20: IC3.36 2244,2750.26 2244,2918 2270,2944 2403.52,2944 2467.52,2880 2467.52,2473.8 K12.2
  Bottom Layer w20: K12.2 2696.32,2245 R21.1
NetIC3_40: IC3.40 K12.9 | length 571
  Bottom Layer w20: IC3.40 2391.32,3050 K12.9
NetK2_1: K2.1 RE1.2 RE1.5 | length 1196.7
  Bottom Layer w50: K2.1 2276.85,370 RE1.5 2527.91,468.39 2880.05,468.39 2950,538.34 2950,738.43 RE1.2
NetK3_2: K3.2 R2.1 R4.1 R9.2 R13.2 | length 2106.4
  Top Layer w20: K3.2 573,2053 573,2206.22 R13.2 R9.2
  Bottom Layer w20: R9.2 862.97,2607 1312.14,2607 R4.1 1346,2728.86 1346,2847 1434,2935 1434,3054.89 R2.1
NetK8_1: K8.1 L2.2 | length 578.7
  Bottom Layer w50: K8.1 480,1540 772.32,1540 777.54,1545.22 795.22,1545.22 L2.2
NetK8_2: K8.2 L2.3 | length 537.3
  Bottom Layer w20: K8.2 710,1160 L2.3
NetL2_1: L2.1 T3.3 | length 575.6
  Top Layer w50: T3.3 v1(1010,1440)
  Bottom Layer w50: L2.1 v1(1010,1440)
NetR7_2: R7.2 R10.2 T1.2 | length 2275.6
  Top Layer w20: R10.2 1074,236.01 1074,388.01 R7.2
  Bottom Layer w20: R10.2 1076.01,146 2839.15,146 T1.2
NetR11_2: R11.2 R12.1 | length 110.8
  Top Layer w20: R11.2 R12.1
NetR17_1: R17.1 T2.2 T4.1 T5.2 | length 1458.4
  Top Layer w20: T4.1 650,1547.9 650,1391.84 T5.2 662.63,1341.84 688.8,1315.67 688.8,1193.7 720,1162.5 T2.2 690,956.48 690,410 R17.1
NetR18_1: R18.1 T2.3 T5.3 | length 1249.2
  Top Layer w20: T5.3 540,1384.2 540,1329 576.55,1292.45 647.55,1292.45 652,1288 652,1159 670,1141 T2.3
  Bottom Layer w20: T5.3 895.8,1444.2 945,1395 1028.64,1395 1125.97,1492.33 R18.1
NetR18_2: R18.2 T3.1 | length 244.8
  Top Layer w20: R18.2 1125.97,1104.03 T3.1
NetR19_1: R19.1 R20.2 T4.2 | length 803.9
  Bottom Layer w20: T4.2 780,1660 R19.1 1150,1740 R20.2
Power-PD1: D2.1 IC3.11 R3.1 R6.2 | length 2412.4
  Top Layer w20: R6.2 986,356.01 986,467 1099,580 1300,580 1400,680 D2.1 1480,1170 1480,1993.74 IC3.11
  Bottom Layer w20: R3.1 892.01,312.01 R6.2
Power-PE0: IC3.19 R7.1 | length 898.2
  Top Layer w20: R7.1 1580,582.01 1580,1206.26 IC3.19
VIN: B1.1 C1.1 R3.2 R17.2 T2.1 T3.2 | length 3423.7
  Top Layer w50: R3.2 R17.2
  Bottom Layer w50: R17.2 790,750 790,1018.95 770,1038.95 T2.1 823.17,1092.8 1040.15,1092.8 1110,1022.95 1110,980 1240,850 B1.1 1571.04,931.04 2370.04,931.04 2760,1321 C1.1
pads on no net: IC1.4 IC3.3 IC3.4 IC3.25 IC3.26 IC3.29 K12.6 K12.8 RE1.4

## Polygon pours and split planes (outlines as drawn)
GND on Bottom Layer "GND_L02_P000" (solid, pour order 0): 40,3190 40,40 3630,40 3630,3190
GND on Top Layer "GND_L01_P001" (solid, pour order 1): 40,3190 40,40 3630,40 3630,3190

## Silkscreen, mask and mechanical layers (free items; w line width, h text height)
Top Overlay:
  text "SOLDERING STATION / B. GERETS 2022" at 290,40 h60
board outline:
  lines w10: 0,3210 0,3230 ; 0,3230 3670,3230 3670,0 ; 0,3230 0,0 942.5,0 2727.5,0 3670,0 ; 3670,0 3670,0